# Altium PCB 夏友.PcbDoc (part 5 of 6)
Units mm, origin at the board's own origin, x right, y up, seen from the top; angles counter-clockwise.
Board outline 130.55 x 65.02 mm, 2 copper layers (Top Layer, Bottom Layer); 162 components, 175 nets, 628 pads, 694 vias.
Unrouted connection lines stored in the file: 1.
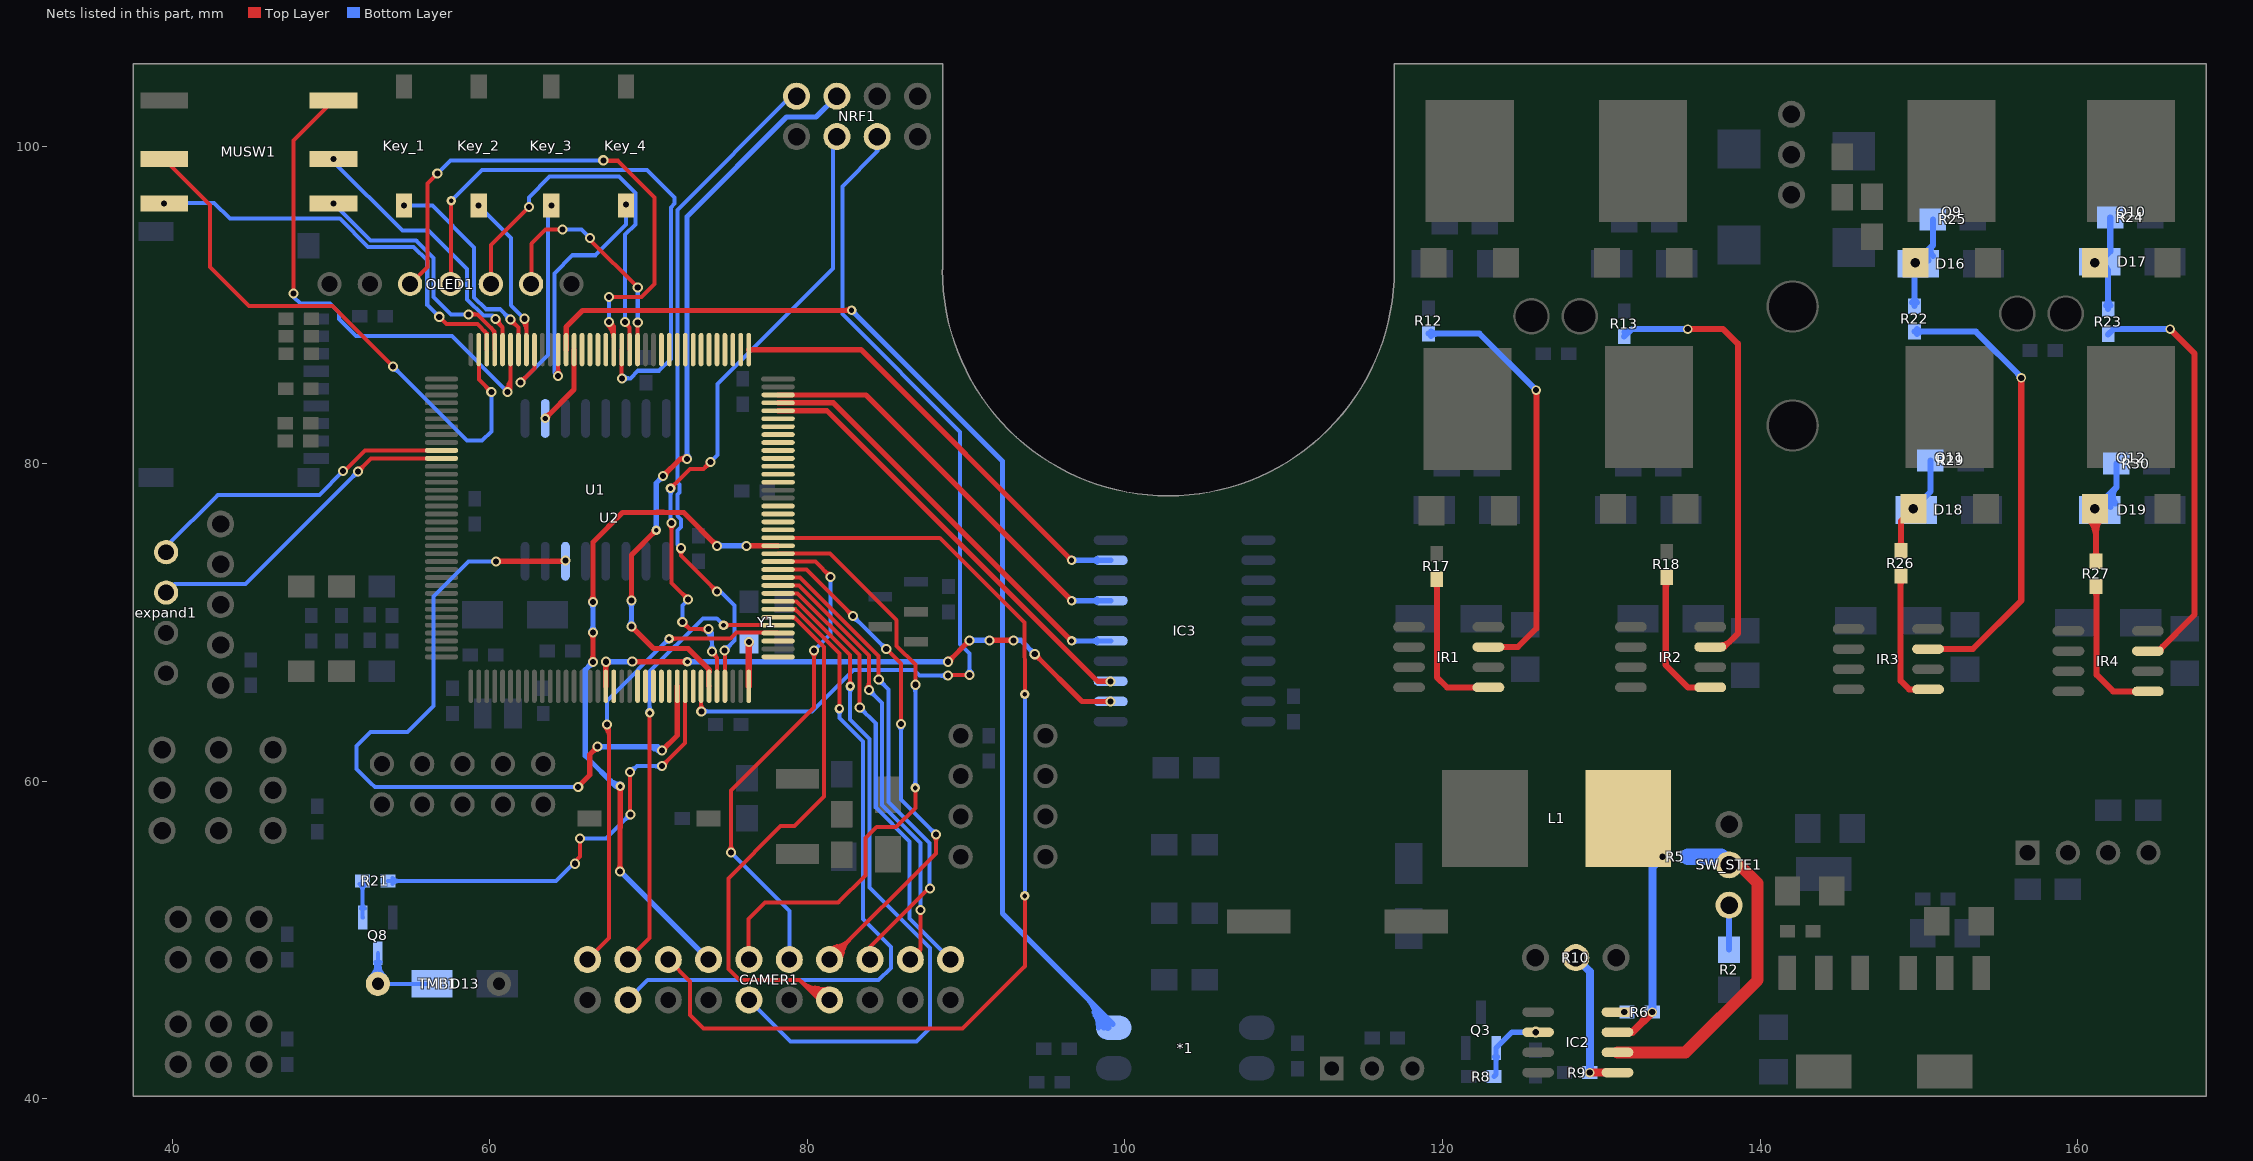
[diagram p5: the nets of this part, all layers, seen from the top]

## Via types
v1: diameter 0.6, hole 0.3, Top Layer to Bottom Layer, 442 vias
v2: diameter 0.635, hole 0.381, Top Layer to Bottom Layer, 150 vias
v3: diameter 0.6, hole 0.381, Top Layer to Bottom Layer, 48 vias
v4: diameter 0.7, hole 0.6, Top Layer to Bottom Layer, 16 vias
v5: diameter 0.6, hole 0.5, Top Layer to Bottom Layer, 10 vias
v6: diameter 0.6, hole 0.4, Top Layer to Bottom Layer, 7 vias
v7: diameter 0.7, hole 0.5, Top Layer to Bottom Layer, 5 vias
v8: diameter 0.6, hole 0.33, Top Layer to Bottom Layer, 5 vias
v9: diameter 0.7, hole 0.4, Top Layer to Bottom Layer, 3 vias
v10: diameter 1, hole 1, Top Layer to Bottom Layer, 2 vias
v11: diameter 3, hole 3, Top Layer to Bottom Layer, 2 vias
v12: diameter 1.016, hole 0.762, Top Layer to Bottom Layer, 2 vias
v13: diameter 0.7, hole 0.381, Top Layer to Bottom Layer, 1 vias
v14: diameter 0.635, hole 0.508, Top Layer to Bottom Layer, 1 vias

## Nets (pads, with @x,y where several pads share a name; then routed paths per layer and width w, separated by ;. In a path a pad name is that pad's centre, name@x,y a point inside that pad or via, vN(x,y) a via of type N, cw(c..) or ccw(c..) an arc to the next point about the centre after c; other vN are vias at no path point) (continued)
NetD13_1: D13.1 Q8.1 TMB1.2 | length 11.8
  Bottom Layer w0.254: TMB1.2@52.51,47.693 ccw(c51.426,48.777) 52.959,48.777 ccw(c54.492,48.777) TMB1.2@53.408,47.693 ; TMB1.2@52.69,47.513 ccw(c52.039,48.164) 52.959,48.164 ccw(c53.879,48.164) TMB1.2@53.228,47.513 ; Q8.1@52.809,48.631 cw(c52.493,48.448) 52.846,48.354 ; 52.826,48.281 cw(c53.281,48.16) Q8.1@53.045,48.567 ; Q8.1@52.873,48.567 cw(c52.637,48.16) 53.092,48.281 ; Q8.1@52.959,49.167 TMB1.2@52.959,47.244 D13.1@56.37,47.244 ; 53.072,48.354 cw(c53.425,48.448) Q8.1@53.109,48.631 ; 52.959,48.299 cw(c53.377,48.299) 53.081,48.595 ccw(c53.377,48.299) 52.959,48.299 ; 52.959,48.299 ccw(c52.541,48.299) 52.837,48.595 cw(c52.541,48.299) 52.959,48.299
NetD16_2: D16.2 Q9.2 R22.1 R25.1 | length 12.7
  Bottom Layer w0.381: R22.1@149.733,89.916 149.733,92.601 v4(149.79,92.657) 150.881,93.749 ; R25.1@150.881,95.377 150.881,93.749 ; 149.733,90.504 cw(c149.227,90.504) 149.585,90.147 ccw(c149.227,90.504) 149.733,90.504 ; 149.733,90.504 ccw(c150.239,90.504) 149.881,90.147 cw(c150.239,90.504) 149.733,90.504 ; D16.2@150.062,92.93 cw(c149.79,93.202) 149.79,92.817 ccw(c149.79,93.202) D16.2@150.062,92.93 ; D16.2@150.062,92.93 ccw(c150.334,92.657) 149.949,92.657 cw(c150.334,92.657) D16.2@150.062,92.93 ; 150.881,93.749 ccw(c151.223,93.406) 150.88,93.065 cw(c151.223,93.406) 150.881,93.749 ; D16.2@149.733,92.135 cw(c150.312,92.135) 149.903,92.545 ccw(c150.312,92.135) D16.2@149.733,92.135 ; D16.2@150.609,92.797 cw(c150.952,93.137) 150.611,93.478 ccw(c150.952,93.137) D16.2@150.609,92.797
NetD17_2: D17.2 Q10.2 R23.2 R24.1 | length 11.9
  Bottom Layer w0.381: D17.2@161.226,92.745 ccw(c161.988,93.244) D17.2@161.802,92.352 ; R23.2@161.925,89.738 D17.2@161.925,92.184 ; R24.1@162.057,95.504 162.057,93.368 D17.2@161.399,92.71 D17.2@161.925,92.184 ; 161.925,90.326 cw(c161.419,90.326) 161.777,89.969 ccw(c161.419,90.326) 161.925,90.326 ; 161.925,90.326 ccw(c162.431,90.326) 162.073,89.969 cw(c162.431,90.326) 161.925,90.326 ; D17.2@161.925,92.184 ccw(c161.162,91.422) 161.102,92.498 cw(c161.162,91.422) D17.2@161.925,92.184 ; D17.2@161.093,92.817 ccw(c161.093,93.814) 161.798,93.109 cw(c161.093,93.814) D17.2@161.093,92.817
  other v4: 161.093,92.657
NetD18_2: D18.2 Q11.2 R26.1 R29.1 | length 10.5
  Top Layer w0.381: R26.1@148.875,74.525 148.875,76.376 v4(149.663,77.163) ; 148.875,75.113 cw(c148.369,75.113) 148.727,74.756 ccw(c148.369,75.113) 148.875,75.113 ; 148.875,75.113 ccw(c149.381,75.113) 149.023,74.756 cw(c149.381,75.113) 148.875,75.113 ; Q11.2@149.391,76.891 cw(c149.663,76.619) 149.663,77.004 ccw(c149.663,76.619) Q11.2@149.391,76.891 ; Q11.2@149.391,76.891 ccw(c149.118,77.163) 149.503,77.163 cw(c149.118,77.163) Q11.2@149.391,76.891
  Bottom Layer w0.381: v4(149.663,77.163) 150.735,78.236 R29.1@150.735,80.2 ; D18.2@149.935,77.436 cw(c149.663,77.708) 149.663,77.323 ccw(c149.663,77.708) D18.2@149.935,77.436 ; D18.2@149.935,77.436 ccw(c150.207,77.163) 149.822,77.163 cw(c150.207,77.163) D18.2@149.935,77.436
NetD19_2: D19.2 Q12.2 R27.2 R30.1 | length 19.6
  Top Layer w0.254: v4(161.093,77.163) Q12.2@161.163,77.093
  Top Layer w0.381: R27.2@161.163,73.863 Q12.2@161.163,77.093 ; 161.163,74.451 cw(c160.657,74.451) 161.015,74.094 ccw(c160.657,74.451) 161.163,74.451 ; 161.163,74.451 ccw(c161.669,74.451) 161.311,74.094 cw(c161.669,74.451) 161.163,74.451 ; Q12.2@160.644,76.615 cw(c159.392,75.362) 161.163,75.362 ccw(c159.392,75.362) Q12.2@160.644,76.615 ; Q12.2@160.98,77.051 cw(c160.538,76.609) 161.163,76.609 ccw(c160.538,76.609) Q12.2@160.98,77.051 ; 161.163,75.701 cw(c162.455,75.701) 161.541,76.615 ccw(c162.455,75.701) 161.163,75.701
  Bottom Layer w0.381: v4(161.093,77.163) 162.438,78.509 ; R30.1@162.438,80.01 162.438,78.509 ; D19.2@161.365,77.436 cw(c161.093,77.708) 161.093,77.323 ccw(c161.093,77.708) D19.2@161.365,77.436 ; D19.2@161.365,77.436 ccw(c161.637,77.163) 161.252,77.163 cw(c161.637,77.163) D19.2@161.365,77.436 ; 162.438,78.509 ccw(c162.98,77.966) 162.369,77.503 cw(c162.98,77.966) 162.438,78.509 ; D19.2@162.066,77.272 cw(c162.629,77.7) 162.129,78.2 ccw(c162.629,77.7) D19.2@162.066,77.272
NetIC2_2: IC2.2 Q3.2 R8.2 | length 5.8
  Bottom Layer w0.33: R8.2@123.25,41.4 123.378,41.528 Q3.2@123.378,43.198 124.38,44.2 v9(125.875,44.2) ; 123.378,42.422 cw(c123.704,42.422) 123.473,42.653 ccw(c123.704,42.422) 123.378,42.422 ; 123.378,42.422 ccw(c123.052,42.422) 123.283,42.653 cw(c123.052,42.422) 123.378,42.422
NetIC2_5: IC2.5 R9.1 R10.2 | length 9.3
  Top Layer w0.508: v6(129.286,41.656) IC2.5@131.024,41.656
  Bottom Layer w0.508: R10.2@128.397,48.895 129.286,48.006 v6(129.286,41.656)
NetIC2_6: IC2.6 R5.2 SW_STE1.2 | length 21.9
  Top Layer w0.762: IC2.6@131.024,42.926 135.301,42.926 139.85,47.475 139.85,53.575 138.688,54.737 SW_STE1.2@138.049,54.737
  Bottom Layer w1.016: R5.2@135.458,55.245 137.541,55.245 SW_STE1.2@138.049,54.737
NetIC2_7: IC2.7 L1.2 R5.1 R6.1 | length 13.6
  Top Layer w0.508: IC2.7@131.024,44.196 131.953,44.196 v6(133.223,45.466)
  Bottom Layer w0.508: v6(133.223,45.466) 133.223,54.61 v6(133.858,55.245) ; R5.1@133.468,54.855 ccw(c133.078,55.245) 133.63,55.245 cw(c133.078,55.245) R5.1@133.468,54.855
NetIC2_8: IC2.8 R6.2
  other v6: 131.445,45.466
NetIR1_5: IR1.5 R17.2 | length 10.8
  Top Layer w0.381: R17.2@119.65,72.298 119.65,66.55 120.287,65.913 IR1.5@122.896,65.913 ; 119.65,72.137 cw(c120.156,72.137) 119.798,72.494 ccw(c120.156,72.137) 119.65,72.137 ; 119.65,72.137 ccw(c119.144,72.137) 119.502,72.494 cw(c119.144,72.137) 119.65,72.137
NetIR1_7: IR1.7 R12.2 | length 28.9
  Top Layer w0.381: IR1.7@122.896,68.453 124.753,68.453 125.925,69.625 125.925,84.6 v3(125.9,84.625) ; v3@125.823,84.548 cw(c125.575,84.3) 125.925,84.3 ccw(c125.575,84.3) v3@125.823,84.548
  Bottom Layer w0.381: R12.2@119.126,88.189 122.336,88.189 v3(125.9,84.625) ; 119.632,88.189 cw(c119.632,88.695) 119.274,88.337 ccw(c119.632,88.695) 119.632,88.189 ; 119.632,88.189 ccw(c119.632,87.683) 119.274,88.041 cw(c119.632,87.683) 119.632,88.189
NetIR2_5: IR2.5 R18.1 | length 10.1
  Top Layer w0.381: R18.1@134.062,72.85 134.062,67.313 135.462,65.913 IR2.5@136.866,65.913 ; 134.062,72.11 cw(c134.783,72.11) 134.273,72.619 ccw(c134.783,72.11) 134.062,72.11
NetIR2_7: IR2.7 R13.1 | length 30.2
  Top Layer w0.381: v3(135.45,88.475) 137.675,88.475 138.6,87.55 138.6,69.3 137.753,68.453 IR2.7@136.866,68.453 ; IR2.7@137.566,68.562 ccw(c137.566,69.278) 138.072,68.772 cw(c137.566,69.278) IR2.7@137.566,68.562
  Bottom Layer w0.381: R13.1@131.445,88.011 131.909,88.475 ; v3(135.45,88.475) 131.909,88.475 ; 131.909,88.475 cw(c131.491,88.893) 131.457,88.303 ccw(c131.491,88.893) 131.909,88.475
NetIR3_5: IR3.5 R26.2 | length 10.2
  Top Layer w0.254: R26.2@148.85,72.9 R26.2@148.875,72.925
  Top Layer w0.381: R26.2@148.85,72.9 148.85,66.325 149.389,65.786 IR3.5@150.582,65.786 ; R26.2@148.727,72.694 cw(c148.43,72.397) 148.85,72.397 ccw(c148.43,72.397) R26.2@148.727,72.694 ; 148.85,72.276 cw(c149.441,72.276) 149.023,72.694 ccw(c149.441,72.276) 148.85,72.276
NetIR3_7: IR3.7 R22.2 | length 31.3
  Top Layer w0.381: IR3.7@150.582,68.326 153.401,68.326 156.45,71.375 v3(156.45,85.4)
  Bottom Layer w0.381: R22.2@149.733,88.316 153.584,88.316 v3@156.475,85.425 ; 150.239,88.316 cw(c150.239,88.822) 149.881,88.464 ccw(c150.239,88.822) 150.239,88.316 ; 150.239,88.316 ccw(c150.239,87.81) 149.881,88.168 cw(c150.239,87.81) 150.239,88.316 ; 156.228,85.672 cw(c155.955,85.4) 156.341,85.4 ccw(c155.955,85.4) 156.228,85.672
NetIR4_5: IR4.5 R27.1 | length 10.8
  Top Layer w0.254: R27.1@161.163,72.263 R27.1@161.2,72.226
  Top Layer w0.381: R27.1@161.2,72.226 161.2,66.7 162.241,65.659 IR4.5@164.425,65.659 ; R27.1@161.015,72.032 cw(c160.568,71.585) 161.2,71.585 ccw(c160.568,71.585) R27.1@161.015,72.032 ; 161.2,71.764 cw(c161.579,71.764) 161.311,72.032 ccw(c161.579,71.764) 161.2,71.764
NetIR4_7: IR4.7 R23.1 | length 27.2
  Top Layer w0.381: IR4.7@164.425,68.199 165.074,68.199 167.375,70.5 167.375,86.925 v3(165.825,88.475) ; IR4.7@165.235,68.199 cw(c165.622,68.199) 165.348,68.473 ccw(c165.622,68.199) IR4.7@165.235,68.199
  Bottom Layer w0.381: R23.1@161.925,88.138 162.262,88.475 v3(165.825,88.475)
NetQ8_2: Q8.2 R21.2 | length 4
  Bottom Layer w0.254: R21.2@51.801,53.528 cw(c51.335,53.062) 51.994,53.062 cw(c52.653,53.062) R21.2@52.187,53.528 ; Q8.2@51.887,51.989 ccw(c51.628,52.248) 51.994,52.248 ; 51.994,52.321 ccw(c52.463,52.321) Q8.2@52.131,51.989 ; R21.2@51.994,53.721 51.994,51.432 Q8.2@52.009,51.417
NetR2_1: R2.1 SW_STE1.3 | length 2.8
  Bottom Layer w0.381: R2.1@138.049,49.398 SW_STE1.3@138.049,52.197
OSC: U2.72 Y1.3 | length 3.4
  Top Layer w0.381: U2.72@76.314,65.981 76.314,68.735 v2(76.337,68.758) ; 76.314,68.396 cw(c76.698,68.396) 76.427,68.668 ccw(c76.698,68.396) 76.314,68.396
PTA4: IC3.2 U2.54 | length 53.7
  Top Layer w0.33: U2.54@67.314,65.981 67.314,67.514 v2(67.325,67.525) ; v2(68.978,67.528) v1@72.425,67.528 ; v2(88.875,67.525) v2(90.225,68.875) ; v2(91.475,68.875) v2(92.975,68.875) ; v2(94.325,68) 97.301,65.024 v2(99.109,65.024) ; 69.346,67.528 cw(c69.346,67.896) 69.086,67.636 ccw(c69.346,67.896) 69.346,67.528 ; 69.346,67.528 ccw(c69.346,67.16) 69.086,67.421 cw(c69.346,67.16) 69.346,67.528 ; 89.135,67.785 cw(c88.875,68.045) 88.875,67.677 ccw(c88.875,68.045) 89.135,67.785 ; 89.135,67.785 ccw(c89.395,67.525) 89.027,67.525 cw(c89.395,67.525) 89.135,67.785 ; 89.965,68.615 cw(c90.225,68.355) 90.225,68.723 ccw(c90.225,68.355) 89.965,68.615 ; 89.965,68.615 ccw(c89.705,68.875) 90.073,68.875 cw(c89.705,68.875) 89.965,68.615 ; 91.843,68.875 cw(c91.843,69.243) 91.583,68.983 ccw(c91.843,69.243) 91.843,68.875 ; 91.843,68.875 ccw(c91.843,68.507) 91.583,68.767 cw(c91.843,68.507) 91.843,68.875 ; 92.607,68.875 cw(c92.607,68.507) 92.867,68.767 ccw(c92.607,68.507) 92.607,68.875 ; 92.607,68.875 ccw(c92.607,69.243) 92.867,68.983 cw(c92.607,69.243) 92.607,68.875 ; 94.585,67.74 cw(c94.845,68) 94.477,68 ccw(c94.845,68) 94.585,67.74 ; 94.585,67.74 ccw(c94.325,67.48) 94.325,67.848 cw(c94.325,67.48) 94.585,67.74 ; 98.741,65.024 cw(c98.741,64.656) 99.001,64.916 ccw(c98.741,64.656) 98.741,65.024 ; 98.741,65.024 ccw(c98.741,65.392) 99.001,65.132 cw(c98.741,65.392) 98.741,65.024 ; v2@67.217,67.417 cw(c66.984,67.184) 67.314,67.184 ccw(c66.984,67.184) v2@67.217,67.417 ; 67.314,67.131 cw(c67.719,67.131) 67.433,67.417 ccw(c67.719,67.131) 67.314,67.131 ; 72.116,67.528 cw(c72.116,67.191) 72.355,67.43 ccw(c72.116,67.191) 72.116,67.528 ; 72.132,67.528 ccw(c72.132,67.843) 72.355,67.62 cw(c72.132,67.843) 72.132,67.528
  Bottom Layer w0.33: v2(67.325,67.525) 68.975,67.525 v2(68.978,67.528) ; v2@67.433,67.417 cw(c67.693,67.157) 67.693,67.525 cw(c67.693,67.893) v2@67.433,67.633 ; v1(72.45,67.525) v2(88.875,67.525) ; v2(90.225,68.875) v2(91.475,68.875) ; v2(92.975,68.875) 93.45,68.875 v2(94.325,68) ; v2@93.083,68.767 cw(c93.343,68.507) 93.343,68.875 cw(c93.343,69.243) v2@93.083,68.983 ; 72.776,67.525 cw(c72.776,67.851) 72.545,67.62 ccw(c72.776,67.851) 72.776,67.525 ; 72.776,67.525 ccw(c72.776,67.199) 72.545,67.43 cw(c72.776,67.199) 72.776,67.525 ; 88.507,67.525 cw(c88.507,67.157) 88.767,67.417 ccw(c88.507,67.157) 88.507,67.525 ; 88.507,67.525 ccw(c88.507,67.893) 88.767,67.633 cw(c88.507,67.893) 88.507,67.525 ; 90.593,68.875 cw(c90.593,69.243) 90.333,68.983 ccw(c90.593,69.243) 90.593,68.875 ; 90.593,68.875 ccw(c90.593,68.507) 90.333,68.767 cw(c90.593,68.507) 90.593,68.875 ; 91.107,68.875 cw(c91.107,68.507) 91.367,68.767 ccw(c91.107,68.507) 91.107,68.875 ; 91.107,68.875 ccw(c91.107,69.243) 91.367,68.983 cw(c91.107,69.243) 91.107,68.875 ; 94.065,68.26 cw(c93.805,68) 94.173,68 ccw(c93.805,68) 94.065,68.26 ; 94.065,68.26 ccw(c94.325,68.52) 94.325,68.152 cw(c94.325,68.52) 94.065,68.26 ; 68.602,67.525 ccw(c68.602,67.904) 68.871,67.636 cw(c68.602,67.904) 68.602,67.525 ; 68.618,67.525 cw(c68.618,67.168) 68.871,67.421 ccw(c68.618,67.168) 68.618,67.525
PTA5: U2.55
PTA6: U2.58
PTA7: U2.59
PTA8: U2.60
PTA9: U2.61
PTA10: U2.62
PTA11: U1.14 U2.63 | length 56.1
  Top Layer w0.33: v2(60.4,73.85) 64.725,73.85 v2(64.775,73.9) ; v2(65.575,59.625) 65.575,59.675 66.3,60.4 66.3,61.675 v2(66.8,62.175) ; v2(70.85,61.925) 71.814,62.889 U2.63@71.814,65.981 ; 60.768,73.85 cw(c60.768,74.218) 60.508,73.958 ccw(c60.768,74.218) 60.768,73.85 ; 60.768,73.85 ccw(c60.768,73.482) 60.508,73.742 cw(c60.768,73.482) 60.768,73.85 ; 66.54,61.915 cw(c66.8,61.655) 66.8,62.023 ccw(c66.8,61.655) 66.54,61.915 ; 66.54,61.915 ccw(c66.28,62.175) 66.648,62.175 cw(c66.28,62.175) 66.54,61.915 ; 71.11,62.185 cw(c70.85,62.445) 70.85,62.077 ccw(c70.85,62.445) 71.11,62.185 ; 71.11,62.185 ccw(c71.37,61.925) 71.002,61.925 cw(c71.37,61.925) 71.11,62.185
  Bottom Layer w0.254: v2(60.4,73.85) 58.675,73.85 56.45,71.625 56.45,64.725 54.825,63.1 52.5,63.1 51.625,62.225 51.625,60.764 52.489,59.9 52.492,59.9 52.766,59.627 53.66,59.627 53.662,59.625 55.304,59.625 55.306,59.627 56.2,59.627 56.202,59.625 57.844,59.625 57.846,59.627 58.74,59.627 58.742,59.625 60.384,59.625 60.386,59.627 61.28,59.627 61.282,59.625 62.924,59.625 62.926,59.627 63.82,59.627 63.822,59.625 v2(65.575,59.625)
  Bottom Layer w0.33: v2(66.8,62.175) 70.6,62.175 v2(70.85,61.925) ; v2@66.908,62.067 cw(c67.168,61.807) 67.168,62.175 cw(c67.168,62.543) v2@66.908,62.283 ; 70.268,62.091 ccw(c70.554,62.586) v2@70.788,62.064 ; 69.879,62.175 cw(c69.879,60.954) 70.742,61.817 ccw(c69.879,60.954) 69.879,62.175
PTA12: R21.1 U2.64 | length 37.9
  Top Layer w0.254: v2(65.378,54.803) 65.378,54.928 65.7,55.25 65.7,56.4 65.681,56.4 v2(65.678,56.403) ; v2(68.828,60.578) 68.828,57.953 v2(68.878,57.903) ; v2(70.85,60.95) 72.314,62.414 U2.64@72.314,65.981 ; v2@70.855,61.14 ccw(c70.866,61.563) 71.168,61.268 ; v2@71.04,60.952 cw(c71.488,60.955) 71.175,61.275 cw(c70.855,61.588) v2@70.852,61.14 ; v2@71.04,60.955 cw(c71.463,60.966) 71.168,61.268 ; v2@70.852,61.14 ccw(c70.857,61.582) 71.166,61.266 ; v2@70.852,61.14 ccw(c70.857,61.582) 71.166,61.266 ; 71.166,61.266 ccw(c71.482,60.957) 71.04,60.952 cw(c71.482,60.957) 71.166,61.266 ; 71.175,61.275 cw(c70.85,61.6) 70.85,61.141 ccw(c70.85,61.6) 71.175,61.275 ; 71.175,61.275 ccw(c71.5,60.95) 71.041,60.95 cw(c71.5,60.95) 71.175,61.275
  Bottom Layer w0.254: R21.1@53.594,53.721 64.171,53.721 65.253,54.803 v2(65.378,54.803) ; R21.1@53.87,53.528 cw(c54.336,53.062) 54.336,53.721 cw(c54.336,54.38) R21.1@53.87,53.914 ; v2(65.678,56.403) 67.328,56.403 68.828,57.903 v2(68.878,57.903) ; v2(68.828,60.578) 68.903,60.578 69.275,60.95 ; v2(70.85,60.95) 69.275,60.95 ; 69.275,60.95 cw(c68.837,61.388) 68.83,60.768 ccw(c68.837,61.388) 69.275,60.95 ; 70.39,60.95 cw(c70.39,60.49) 70.715,60.815 ccw(c70.39,60.49) 70.39,60.95 ; 70.39,60.95 ccw(c70.39,61.41) 70.715,61.085 cw(c70.39,61.41) 70.39,60.95 ; 68.467,57.542 cw(c68.878,57.13) 68.878,57.712 ccw(c68.878,57.13) 68.467,57.542 ; 68.589,57.664 ccw(c68.35,57.903) 68.688,57.903 cw(c68.35,57.903) 68.589,57.664 ; v2@69.019,60.578 cw(c69.299,60.578) 69.101,60.776 ccw(c69.299,60.578) v2@69.019,60.578
PTA13: U2.65
PTA14: NRF1.5 U2.66 | length 64.3
  Top Layer w0.254: U2.66@73.314,65.981 73.314,64.411 v2(73.325,64.4) ; v2(88.85,66.65) 88.9,66.7 v2(90.225,66.7) ; v2@73.19,64.535 ccw(c72.892,64.833) 73.314,64.833 cw(c72.892,64.833) v2@73.19,64.535 ; 73.314,64.886 ccw(c73.811,64.886) 73.46,64.535 cw(c73.811,64.886) 73.314,64.886
  Bottom Layer w0.254: v2(73.325,64.4) 80.306,64.4 82.903,66.997 86.73,66.997 87.077,66.65 v2(88.85,66.65) ; NRF1.5@84.217,99.902 cw(c84.152,99.657) 84.405,99.657 ; NRF1.5@84.405,100.6 84.405,99.657 ; NRF1.5@84.593,99.902 ccw(c84.658,99.657) 84.405,99.657 ; v2(90.225,66.7) 90.225,68.031 89.628,68.628 89.628,82.003 82.208,89.423 82.208,97.46 84.405,99.657 ; 73.785,64.4 cw(c73.785,64.86) 73.46,64.535 ccw(c73.785,64.86) 73.785,64.4 ; 73.785,64.4 ccw(c73.785,63.94) 73.46,64.265 cw(c73.785,63.94) 73.785,64.4 ; 88.39,66.65 cw(c88.39,66.19) 88.715,66.515 ccw(c88.39,66.19) 88.39,66.65 ; 88.39,66.65 ccw(c88.39,67.11) 88.715,66.785 cw(c88.39,67.11) 88.39,66.65 ; 90.225,67.16 cw(c89.765,67.16) 90.09,66.835 ccw(c89.765,67.16) 90.225,67.16 ; 90.225,67.16 ccw(c90.685,67.16) 90.36,66.835 cw(c90.685,67.16) 90.225,67.16
PTA15: NRF1.4 U2.67 | length 57.8
  Top Layer w0.33: v2(68.925,69.75) 70.317,68.358 72.499,68.358 73.782,67.075 ; v2(68.928,71.378) 68.928,74.253 v1(70.487,75.812) ; v2(70.925,79.225) 72,80.3 72.425,80.3 v2(72.429,80.304) ; U2.67@73.814,65.981 73.782,66.014 73.782,67.075 ; 68.928,71.746 cw(c68.56,71.746) 68.821,71.486 ccw(c68.56,71.746) 68.928,71.746 ; 68.928,71.746 ccw(c69.296,71.746) 69.036,71.486 cw(c69.296,71.746) 68.928,71.746 ; 69.185,69.49 cw(c69.445,69.75) 69.077,69.75 ccw(c69.445,69.75) 69.185,69.49 ; 69.185,69.49 ccw(c68.925,69.23) 68.925,69.598 cw(c68.925,69.23) 69.185,69.49 ; 70.257,75.582 cw(c70.487,75.352) 70.487,75.678 ccw(c70.487,75.352) 70.257,75.582 ; 70.257,75.582 ccw(c70.027,75.812) 70.353,75.812 cw(c70.027,75.812) 70.257,75.582 ; 71.185,79.485 cw(c70.925,79.745) 70.925,79.377 ccw(c70.925,79.745) 71.185,79.485 ; 71.185,79.485 ccw(c71.445,79.225) 71.077,79.225 cw(c71.445,79.225) 71.185,79.485 ; 73.782,67.075 cw(c73.644,66.938) 73.828,66.876 ccw(c73.644,66.938) 73.782,67.075 ; 72.051,80.3 ccw(c72.051,80.681) 72.321,80.412 cw(c72.051,80.681) 72.051,80.3 ; 72.07,80.3 cw(c72.07,79.945) 72.321,80.196 ccw(c72.07,79.945) 72.07,80.3 ; 73.726,67.13 cw(c73.477,66.881) 73.829,66.881 ccw(c73.477,66.881) 73.726,67.13
  Bottom Layer w0.33: v2@68.817,69.858 ccw(c68.557,70.118) 68.925,70.118 ccw(c69.293,70.118) v2@69.033,69.858 ; v2@68.821,71.271 cw(c68.569,71.019) 68.925,71.019 ; v2(68.925,69.75) 68.925,71.375 v2(68.928,71.378) ; 68.925,71.002 cw(c69.304,71.002) v2@69.036,71.271 ; v1(70.487,75.812) 70.487,78.788 v2(70.925,79.225) ; v2@72.3,80.3 72.425,80.3 72.425,95.55 78.7,101.825 80.55,101.825 NRF1.4@81.865,103.14 ; v2@72.321,80.412 ccw(c72.07,80.662) 72.425,80.662 ; 72.425,80.681 ccw(c72.806,80.681) v2@72.536,80.412 ; 70.487,76.138 cw(c70.162,76.138) 70.392,75.908 ccw(c70.162,76.138) 70.487,76.138 ; 70.487,76.138 ccw(c70.813,76.138) 70.583,75.908 cw(c70.813,76.138) 70.487,76.138 ; 70.665,78.965 cw(c70.925,78.705) 70.925,79.073 ccw(c70.925,78.705) 70.665,78.965 ; 70.665,78.965 ccw(c70.405,79.225) 70.773,79.225 cw(c70.405,79.225) 70.665,78.965
PTA16: NRF1.3 U2.68 | length 63.2
  Top Layer w0.254: v1(71.388,78.438) 72.625,79.675 73.475,79.675 v2(73.9,80.1) ; v2(71.45,76.25) 71.453,76.247 71.453,72.497 v2(72.5,71.45) ; v2(72.129,70.028) 72.147,70.028 72.6,69.575 v2(73.775,69.575) ; 72.182,71.768 ccw(c72.484,72.063) v2@72.495,71.64 ; 72.182,71.768 cw(c71.887,71.466) v2@72.31,71.455 ; v2@72.31,71.452 ccw(c71.862,71.455) 72.175,71.775 ccw(c72.495,72.088) v2@72.498,71.64 ; v2@73.71,80.095 cw(c73.287,80.084) 73.582,79.782 cw(c73.884,79.487) v2@73.895,79.91 ; v2@73.71,80.098 cw(c73.262,80.095) 73.575,79.775 ; v2@73.898,79.91 ccw(c73.895,79.462) 73.575,79.775 ; v2(74.004,68.178) 74.004,68.071 74.314,67.761 ; v2@74.044,68.227 cw(c73.741,67.862) 74.214,67.906 ; U2.68@74.314,65.981 74.314,67.761 ; 71.683,78.733 cw(c71.388,79.028) 71.388,78.611 ccw(c71.388,79.028) 71.683,78.733 ; 71.683,78.733 ccw(c71.978,78.438) 71.561,78.438 cw(c71.978,78.438) 71.683,78.733 ; 72.175,71.775 cw(c71.85,71.45) 72.309,71.45 ccw(c71.85,71.45) 72.175,71.775 ; 72.175,71.775 ccw(c72.5,72.1) 72.5,71.64 cw(c72.5,72.1) 72.175,71.775 ; 72.184,71.766 cw(c71.868,71.457) 72.31,71.452 ccw(c71.868,71.457) 72.184,71.766 ; 72.184,71.766 ccw(c72.493,72.082) v2@72.498,71.64 ; 72.184,71.766 ccw(c72.493,72.082) v2@72.498,71.64 ; 73.315,69.575 cw(c73.315,69.115) 73.64,69.44 ccw(c73.315,69.115) 73.315,69.575 ; 73.315,69.575 ccw(c73.315,70.035) 73.64,69.71 cw(c73.315,70.035) 73.315,69.575 ; 73.575,79.775 cw(c73.9,79.45) 73.9,79.909 ccw(c73.9,79.45) 73.575,79.775 ; 73.575,79.775 ccw(c73.25,80.1) 73.709,80.1 cw(c73.25,80.1) 73.575,79.775 ; 73.584,79.784 cw(c73.893,79.468) 73.898,79.91 ccw(c73.893,79.468) 73.584,79.784 ; 73.584,79.784 ccw(c73.268,80.093) 73.71,80.098 cw(c73.268,80.093) 73.584,79.784 ; 74.314,67.761 cw(c74.625,68.072) 74.191,68.146 ccw(c74.625,68.072) 74.314,67.761 ; v2@71.315,76.115 cw(c70.983,75.783) 71.453,75.783 ccw(c70.983,75.783) v2@71.315,76.115 ; 71.453,75.798 cw(c71.902,75.798) 71.585,76.115 ccw(c71.902,75.798) 71.453,75.798 ; v2@72.129,69.838 cw(c72.129,69.334) 72.485,69.69 ccw(c72.129,69.334) v2@72.129,69.838 ; v2@72.319,70.028 ccw(c72.735,70.028) 72.441,69.734 cw(c72.735,70.028) v2@72.319,70.028
  Bottom Layer w0.254: v1@71.4,78.438 71.4,76.3 v2(71.45,76.25) ; v2(72.129,70.028) 72.129,71.079 v2(72.5,71.45) ; v2(73.775,69.575) 74.004,69.346 v2(74.004,68.178) ; v2(73.9,80.1) 74.355,80.555 74.355,85.031 81.625,92.301 81.625,100.36 NRF1.3@81.865,100.6 ; 73.908,68.976 cw(c74.301,69.203) v2@73.931,69.465 ; 74.004,68.638 cw(c73.544,68.638) 73.869,68.313 ccw(c73.544,68.638) 74.004,68.638 ; 74.004,68.638 ccw(c74.464,68.638) 74.138,68.313 cw(c74.464,68.638) 74.004,68.638 ; v1@71.265,78.315 cw(c70.94,77.99) 71.4,77.99 ccw(c70.94,77.99) v1@71.265,78.315 ; 71.4,78.05 cw(c71.775,78.05) 71.51,78.315 ccw(c71.775,78.05) 71.4,78.05 ; v2@73.64,69.44 cw(c72.763,68.563) 74.004,68.563 ccw(c72.763,68.563) v2@73.64,69.44 ; v2@73.82,69.62 cw(c73.376,69.176) 74.004,69.176 ccw(c73.376,69.176) v2@73.82,69.62
PTA17: NRF1.2 U2.69 | length 51.2
  Top Layer w0.254: v2(72.05,74.675) 72.05,74.207 v2(74.304,71.954) ; v2@74.113,71.958 ccw(c73.691,71.969) 73.986,72.271 ccw(c74.288,72.566) v2@74.299,72.144 ; v2@74.302,72.144 cw(c74.298,72.591) 73.978,72.279 ; v2(74.8,68.225) 74.814,68.211 U2.69@74.814,65.981 ; 72.05,74.215 cw(c72.51,74.215) 72.185,74.54 ccw(c72.51,74.215) 72.05,74.215 ; 72.05,74.215 ccw(c71.59,74.215) 71.915,74.54 cw(c71.59,74.215) 72.05,74.215 ; 73.978,72.279 cw(c73.653,71.954) 74.113,71.954 ccw(c73.653,71.954) 73.978,72.279 ; 73.978,72.279 ccw(c74.304,72.604) 74.304,72.144 cw(c74.304,72.604) 73.978,72.279 ; 73.978,72.279 cw(c73.666,71.959) v2@74.113,71.955 ; 73.988,72.269 cw(c73.672,71.961) v2@74.113,71.956 ; 73.988,72.269 cw(c73.672,71.961) v2@74.113,71.956 ; 73.988,72.27 ccw(c74.296,72.585) 74.301,72.144 cw(c74.296,72.585) 73.988,72.27
  Bottom Layer w0.254: v2(72.05,74.675) 71.825,74.9 71.825,75.781 72.047,76.003 72.047,76.497 71.825,76.719 71.825,78.056 71.967,78.198 71.967,78.677 71.825,78.819 71.825,95.975 78.99,103.14 NRF1.2@79.325,103.14 ; v2(74.304,71.954) 74.546,71.954 75.425,71.075 75.425,68.85 v2(74.8,68.225) ; 75.116,68.541 cw(c74.807,68.857) 74.802,68.415 ccw(c74.805,68.863) 75.125,68.55 ; 75.116,68.541 ccw(c75.432,68.232) 74.99,68.227 cw(c75.438,68.23) 75.125,68.55 ; 75.125,68.55 cw(c74.8,68.875) 74.8,68.415 ccw(c74.8,68.875) 75.125,68.55 ; 75.125,68.55 ccw(c75.45,68.225) 74.991,68.225 cw(c75.45,68.225) 75.125,68.55
PTA19: U2.73
PTA24: U2.75
PTA25: CAMER1.19 U2.76 | length 34
  Top Layer w0.254: CAMER1.19@66.167,48.768 67.525,50.126 67.525,63.425 v2(67.375,63.575) ; 67.439,63.097 cw(c67.666,63.228) v2@67.497,63.429 ; v1(71.3,68.975) 75.15,68.975 75.53,69.355 78.14,69.355 U2.76@78.164,69.331 ; 71.718,68.975 cw(c71.718,69.393) 71.422,69.097 ccw(c71.718,69.393) 71.718,68.975 ; 71.718,68.975 ccw(c71.718,68.557) 71.422,68.853 cw(c71.718,68.557) 71.718,68.975 ; v2@67.24,63.44 cw(c66.553,62.753) 67.525,62.753 ccw(c66.553,62.753) v2@67.24,63.44
  Bottom Layer w0.254: v2(67.375,63.575) 67.375,65.05 v1(71.3,68.975) ; 71.005,68.68 cw(c71.3,68.384) 71.3,68.802 ccw(c71.3,68.384) 71.005,68.68 ; 71.005,68.68 ccw(c70.709,68.975) 71.127,68.975 cw(c70.709,68.975) 71.005,68.68
PTA26: CAMER1.17 U2.77 | length 31
  Top Layer w0.254: CAMER1.17@68.707,48.768 70.075,50.136 v1(70.075,64.3) ; v1@74.731,69.831 U2.77@78.164,69.831 ; v1@74.847,69.703 cw(c75.157,69.393) 75.157,69.831 ccw(c75.157,69.393) v1@74.847,69.703 ; v1@74.847,69.947 ccw(c75.128,70.228) 75.128,69.831 cw(c75.128,70.228) v1@74.847,69.947
  Top Layer w0.381: v1(74.725,69.825) v1@74.731,69.831
  Bottom Layer w0.254: v1(70.075,64.3) 70.075,66.9 73.425,70.25 74.3,70.25 v1(74.725,69.825) ; 70.075,64.718 cw(c69.657,64.718) 69.953,64.422 ccw(c69.657,64.718) 70.075,64.718 ; 70.075,64.718 ccw(c70.493,64.718) 70.197,64.422 cw(c70.493,64.718) 70.075,64.718
PTA27: CAMER1.8 U2.78 | length 48.5
  Top Layer w0.254: U2.78@78.164,70.331 79.171,70.331 81.05,68.452 81.05,59.025 79.2,57.175 78.325,57.175 75.025,53.875 75.025,48.175 75.725,47.475 79.525,47.475 ; 80.443,46.753 cw(c80.337,45.304) CAMER1.8@81.437,46.253 ; 80.482,46.996 cw(c80.36,45.323) CAMER1.8@81.629,46.42 ; CAMER1.8@81.407,46.228 80.772,46.228 79.525,47.475 ; 79.525,47.475 ccw(c80.905,48.855) 81.271,46.938 cw(c80.905,48.855) 79.525,47.475 ; U2.78@79.064,70.308 cw(c79.064,69.994) 79.286,70.216 ccw(c79.064,69.994) U2.78@79.064,70.308 ; 79.864,47.136 ccw(c81.014,48.285) 81.319,46.689 cw(c81.014,48.285) 79.864,47.136 ; 80.203,46.797 ccw(c81.122,47.716) 81.367,46.439 cw(c81.122,47.716) 80.203,46.797 ; 80.542,46.458 ccw(c81.231,47.147) 81.414,46.19 cw(c81.231,47.147) 80.542,46.458
PTA28: CAMER1.18 U2.79 | length 45.7
  Top Layer w0.254: U2.79@78.164,70.831 79.246,70.831 82.025,68.052 v1(82.025,64.575) ; U2.79@79.064,70.808 cw(c79.064,70.313) 79.414,70.663 ccw(c79.064,70.313) U2.79@79.064,70.808
  Bottom Layer w0.254: CAMER1.18@68.707,46.228 69.954,47.475 84.5,47.475 85.275,48.25 85.275,49.55 83.5,51.325 83.5,62.5 82.025,63.975 v1(82.025,64.575) ; 82.025,64.157 cw(c82.443,64.157) 82.147,64.453 ccw(c82.443,64.157) 82.025,64.157 ; 82.025,64.157 ccw(c81.607,64.157) 81.903,64.453 cw(c81.607,64.157) 82.025,64.157
PTA29: CAMER1.12 U2.80 | length 46.9
  Top Layer w0.254: U2.80@78.164,71.331 79.321,71.331 82.7,67.952 v1(82.7,65.975) ; 82.7,66.393 cw(c82.282,66.393) 82.578,66.097 ccw(c82.282,66.393) 82.7,66.393 ; 82.7,66.393 ccw(c83.118,66.393) 82.822,66.097 cw(c83.118,66.393) 82.7,66.393
  Bottom Layer w0.254: CAMER1.12@76.327,46.228 78.935,43.62 86.875,43.62 87.719,44.464 87.719,49.506 83.906,53.319 83.906,62.668 82.7,63.875 v1(82.7,65.975) ; 82.7,65.557 cw(c83.118,65.557) 82.822,65.853 ccw(c83.118,65.557) 82.7,65.557 ; 82.7,65.557 ccw(c82.282,65.557) 82.578,65.853 cw(c82.282,65.557) 82.7,65.557
PTB0: CAMER1.1 U2.81 | length 31.1
  Top Layer w0.254: U2.81@78.164,71.831 79.395,71.831 83.279,67.947 83.279,64.678 v2(83.304,64.653)
  Bottom Layer w0.254: v2(83.304,64.653) 84.313,63.644 84.313,58.35 86.45,56.213 86.45,51.35 89.027,48.773 CAMER1.1@89.027,48.768 ; v2@83.306,64.463 cw(c83.309,64.015) 83.629,64.328 ; v2@83.306,64.463 cw(c83.312,64.021) 83.62,64.337 ; v2@83.495,64.651 ccw(c83.936,64.646) 83.62,64.337 ; v2@83.495,64.652 ccw(c83.942,64.648) 83.629,64.328 ; 83.629,64.328 cw(c83.954,64.653) 83.495,64.653 ccw(c83.954,64.653) 83.629,64.328 ; 83.629,64.328 ccw(c83.304,64.003) 83.304,64.463 cw(c83.304,64.003) 83.629,64.328
PTB1: CAMER1.3 U2.82 | length 33.7
  Top Layer w0.254: U2.82@78.164,72.331 79.47,72.331 83.875,67.926 83.875,65.757 v2(83.879,65.753) ; CAMER1.3@86.487,48.768 87.125,49.406 ; v2(87.125,51.9) 87.125,49.406 ; 87.125,49.406 cw(c86.983,49.548) 86.875,49.378 ccw(c86.983,49.548) 87.125,49.406 ; 87.125,49.406 ccw(c87.267,49.264) 87.097,49.156 cw(c87.267,49.264) 87.125,49.406 ; v2@83.744,65.888 ccw(c83.429,66.203) 83.875,66.203 cw(c83.429,66.203) v2@83.744,65.888 ; 83.875,66.223 ccw(c84.349,66.223) 84.014,65.888 cw(c84.349,66.223) 83.875,66.223
  Bottom Layer w0.254: v2(83.879,65.753) 84.719,64.913 84.719,58.518 87.125,56.113 v2(87.125,51.9) ; v2@84.07,65.751 ccw(c84.511,65.746) 84.195,65.437 ccw(c83.887,65.121) 83.881,65.563 cw(c83.884,65.115) 84.204,65.428 ; v2@84.07,65.752 ccw(c84.517,65.748) 84.204,65.428 ; 84.204,65.428 cw(c84.53,65.753) 84.07,65.753 ccw(c84.53,65.753) 84.204,65.428 ; 84.204,65.428 ccw(c83.879,65.103) 83.879,65.563 cw(c83.879,65.103) 84.204,65.428
PTB2: CAMER1.5 U2.83 | length 33.3
  Top Layer w0.254: U2.83@78.164,72.831 79.545,72.831 84.5,67.876 v2(84.5,66.4) ; CAMER1.5@83.947,48.768 83.947,49.566 87.633,53.253 v2(87.729,53.253)
  Bottom Layer w0.254: v2(84.5,66.4) 85.126,65.774 85.126,58.687 87.7,56.112 87.7,53.282 v2(87.729,53.253) ; 84.825,66.075 ccw(c84.505,65.762) 84.502,66.21 cw(c84.507,65.768) 84.816,66.084 cw(c85.132,66.393) 84.69,66.398 ccw(c85.138,66.395) 84.825,66.075 ; 84.825,66.075 cw(c85.15,66.4) 84.691,66.4 ccw(c85.15,66.4) 84.825,66.075 ; v2@84.5,66.209 cw(c84.5,65.75) 84.825,66.075 ccw(c84.5,65.75) v2@84.5,66.209
PTB3: CAMER1.7 U2.84 | length 60.8
  Top Layer w0.254: U2.84@78.164,73.331 79.944,73.331 v2(82.875,70.4) ; CAMER1.7@81.12,48.827 cw(c82.126,48.621) 81.86,49.612 ; CAMER1.7@81.369,48.776 cw(c82.576,48.529) 82.257,49.719 ; CAMER1.7@81.407,48.768 88.1,55.461 v2(88.1,56.65) ; CAMER1.7@81.415,48.73 ccw(c81.168,49.937) 82.358,49.618 ; CAMER1.7@81.466,48.481 ccw(c81.26,49.487) 82.251,49.221 ; v2@82.685,70.402 ccw(c82.237,70.405) 82.55,70.725 ; v2@82.685,70.405 ccw(c82.262,70.416) 82.557,70.718 ccw(c82.859,71.013) v2@82.87,70.59 ; v2@82.873,70.59 cw(c82.87,71.038) 82.55,70.725 ; v2(84.975,68.325) 85.9,67.4 v2(85.9,63.6) ; 82.208,49.569 cw(c81.407,50.369) 81.407,49.237 ccw(c81.407,50.369) 82.208,49.569 ; 82.208,49.569 ccw(c83.008,48.768) 81.876,48.768 cw(c83.008,48.768) 82.208,49.569 ; 82.55,70.725 cw(c82.225,70.4) 82.685,70.4 ccw(c82.225,70.4) 82.55,70.725 ; 82.55,70.725 ccw(c82.875,71.05) 82.875,70.59 cw(c82.875,71.05) 82.55,70.725 ; 82.559,70.716 cw(c82.243,70.407) 82.685,70.402 ccw(c82.243,70.407) 82.559,70.716 ; 82.559,70.716 ccw(c82.868,71.032) 82.873,70.59 cw(c82.868,71.032) 82.559,70.716 ; 82.641,50.002 cw(c81.407,51.236) 81.407,49.491 ccw(c81.407,51.236) 82.641,50.002 ; 82.641,50.002 ccw(c83.875,48.768) 82.13,48.768 cw(c83.875,48.768) 82.641,50.002 ; 88.1,56.19 cw(c88.56,56.19) 88.235,56.515 ccw(c88.56,56.19) 88.1,56.19 ; 88.1,56.19 ccw(c87.64,56.19) 87.965,56.515 cw(c87.64,56.19) 88.1,56.19
  Bottom Layer w0.254: v2(82.875,70.4) 84.95,68.325 v2(84.975,68.325) ; v2@82.877,70.21 cw(c82.88,69.762) 83.2,70.075 ; v2@82.877,70.21 cw(c82.882,69.768) 83.191,70.084 cw(c83.507,70.393) v2@83.065,70.398 ; v2@83.065,70.398 ccw(c83.513,70.395) 83.2,70.075 ; v2(85.9,63.6) 85.9,58.85 v2(88.1,56.65) ; v2@88.098,56.84 cw(c88.093,57.282) 87.784,56.966 cw(c87.468,56.657) 87.91,56.652 ccw(c87.462,56.655) 87.775,56.975 ; v2@88.098,56.84 cw(c88.095,57.288) 87.775,56.975 ; 83.2,70.075 cw(c83.525,70.4) 83.066,70.4 ccw(c83.525,70.4) 83.2,70.075 ; 83.2,70.075 ccw(c82.875,69.75) 82.875,70.209 cw(c82.875,69.75) 83.2,70.075 ; 85.9,63.14 cw(c86.36,63.14) 86.035,63.465 ccw(c86.36,63.14) 85.9,63.14 ; 85.9,63.14 ccw(c85.44,63.14) 85.765,63.465 cw(c85.44,63.14) 85.9,63.14 ; 87.775,56.975 cw(c87.45,56.65) 87.909,56.65 ccw(c87.45,56.65) 87.775,56.975 ; 87.775,56.975 ccw(c88.1,57.3) 88.1,56.841 cw(c88.1,57.3) 87.775,56.975 ; 84.607,68.668 ccw(c84.975,69.036) 84.975,68.515 cw(c84.975,69.036) 84.607,68.668 ; 84.667,68.608 cw(c84.385,68.325) 84.784,68.325 ccw(c84.385,68.325) 84.667,68.608
PTB4: CAMER1.9 U2.85 | length 39.1
  Top Layer w0.254: v2(75.2,55.5) 75.2,59.425 80.425,64.65 v2(80.425,68.225) ; U2.85@78.164,73.831 80.519,73.831 v2(81.475,72.875) ; 81.157,73.193 ccw(c81.459,73.488) v2@81.47,73.065 ; 81.157,73.193 cw(c80.862,72.891) v2@81.285,72.88 ; v2@81.285,72.877 ccw(c80.837,72.88) 81.15,73.2 ; 75.2,55.96 cw(c74.74,55.96) 75.065,55.635 ccw(c74.74,55.96) 75.2,55.96 ; 75.2,55.96 ccw(c75.66,55.96) 75.335,55.635 cw(c75.66,55.96) 75.2,55.96 ; 80.425,67.765 cw(c80.885,67.765) 80.56,68.09 ccw(c80.885,67.765) 80.425,67.765 ; 80.425,67.765 ccw(c79.965,67.765) 80.29,68.09 cw(c79.965,67.765) 80.425,67.765 ; 81.15,73.2 ccw(c81.47,73.513) v2@81.473,73.065 ; 81.15,73.2 cw(c80.825,72.875) 81.285,72.875 ccw(c80.825,72.875) 81.15,73.2 ; 81.15,73.2 ccw(c81.475,73.525) 81.475,73.066 cw(c81.475,73.525) 81.15,73.2 ; 81.159,73.191 cw(c80.843,72.882) 81.285,72.877 ccw(c80.843,72.882) 81.159,73.191 ; 81.159,73.191 ccw(c81.468,73.507) v2@81.473,73.065 ; 81.159,73.191 ccw(c81.468,73.507) v2@81.473,73.065
  Bottom Layer w0.254: v2(75.2,55.5) 78.867,51.833 CAMER1.9@78.867,48.768 ; v2(80.425,68.225) 81.475,69.275 v2(81.475,72.875)
PTB5: CAMER1.11 U2.86 | length 41.6
  Top Layer w0.254: CAMER1.11@76.327,48.768 76.3,48.795 76.3,51.325 77.325,52.35 81.95,52.35 83.675,54.075 83.675,56.425 84.375,57.125 85.6,57.125 86.804,58.329 v1(86.804,59.579) ; U2.86@78.164,74.331 81.437,74.331 85.629,70.139 85.629,68.521 86.804,67.346 v2(86.804,66.078)
  Bottom Layer w0.254: v1(86.804,59.579) v2(86.804,66.078) ; 86.804,59.997 cw(c86.387,59.997) 86.682,59.702 ccw(c86.387,59.997) 86.804,59.997 ; 86.804,59.997 ccw(c87.222,59.997) 86.927,59.702 cw(c87.222,59.997) 86.804,59.997 ; 86.804,65.618 cw(c87.264,65.618) 86.939,65.944 ccw(c87.264,65.618) 86.804,65.618 ; 86.804,65.618 ccw(c86.344,65.618) 86.67,65.944 cw(c86.344,65.618) 86.804,65.618
PTB6: CAMER1.13 U2.87 | length 55.6
  Top Layer w0.33: v2(66.5,69.375) 66.5,67.507 v2(66.503,67.503) ; v2(66.5,71.3) 66.5,75.05 68.375,76.925 70.543,76.925 70.55,76.933 70.95,76.933 70.958,76.925 72.225,76.925 v2(74.325,74.825) ; v2(68.2,54.325) v1@68.226,59.675 ; v2(76.175,74.825) 76.181,74.831 U2.87@78.164,74.831 ; 66.5,69.007 cw(c66.868,69.007) 66.608,69.267 ccw(c66.868,69.007) 66.5,69.007 ; 66.5,69.007 ccw(c66.132,69.007) 66.392,69.267 cw(c66.132,69.007) 66.5,69.007 ; 66.5,71.668 cw(c66.132,71.668) 66.392,71.408 ccw(c66.132,71.668) 66.5,71.668 ; 66.5,71.668 ccw(c66.868,71.668) 66.608,71.408 cw(c66.868,71.668) 66.5,71.668 ; 68.202,54.693 cw(c67.834,54.695) 68.093,54.433 ccw(c67.834,54.695) 68.202,54.693 ; 68.202,54.693 ccw(c68.57,54.691) 68.308,54.432 cw(c68.57,54.691) 68.202,54.693 ; 74.065,75.085 cw(c73.805,74.825) 74.173,74.825 ccw(c73.805,74.825) 74.065,75.085 ; 74.065,75.085 ccw(c74.325,75.345) 74.325,74.977 cw(c74.325,75.345) 74.065,75.085 ; v2@66.395,67.611 ccw(c66.143,67.863) 66.5,67.863 cw(c66.143,67.863) v2@66.395,67.611 ; 66.5,67.879 ccw(c66.879,67.879) 66.611,67.611 cw(c66.879,67.879) 66.5,67.879 ; v1@68.129,59.58 cw(c67.895,59.348) 68.224,59.347 ccw(c67.895,59.348) v1@68.129,59.58 ; 68.225,59.352 cw(c68.546,59.35) 68.32,59.579 ccw(c68.546,59.35) 68.225,59.352
  Bottom Layer w0.33: v2@66.351,67.503 cw(c65.983,67.503) 66.243,67.243 cw(c66.503,66.983) v2@66.503,67.351 ; v2@66.392,69.483 ccw(c66.132,69.743) 66.5,69.743 ccw(c66.868,69.743) v2@66.608,69.483 ; v2@66.392,71.192 cw(c66.132,70.932) 66.5,70.932 cw(c66.868,70.932) v2@66.608,71.192 ; v2(66.5,69.375) v2(66.5,71.3) ; v2(66.503,67.503) 66.015,67.015 66.015,61.61 67.95,59.675 v1(68.225,59.675) ; 67.64,59.967 cw(c67.441,59.222) v1@68.108,59.608 ; v2(68.2,54.325) 68.23,54.325 CAMER1.13@73.787,48.768 ; v2(74.325,74.825) v2(76.175,74.825) ; v2@74.433,74.717 cw(c74.693,74.457) 74.693,74.825 cw(c74.693,75.193) v2@74.433,74.933 ; 75.807,74.825 cw(c75.807,74.457) 76.067,74.717 ccw(c75.807,74.457) 75.807,74.825 ; 75.807,74.825 ccw(c75.807,75.193) 76.067,74.933 cw(c75.807,75.193) 75.807,74.825 ; 67.525,60.1 ccw(c68.225,60.799) 68.225,59.81 cw(c68.225,60.799) 67.525,60.1
PTB7: CAMER1.15 U2.88 | length 66.5
  Top Layer w0.254: CAMER1.15@71.247,48.768 72.625,47.39 72.625,45.275 73.475,44.425 89.775,44.425 93.7,48.35 v1(93.7,52.775) ; U2.88@78.164,75.331 88.344,75.331 93.675,70 v1(93.7,65.475)
  Bottom Layer w0.254: v1@93.7,52.75 v1(93.7,65.475)
PTB8: U2.89
PTB9: U2.90
PTB10: U2.91
PTB11: U2.92
PTB16: U2.95
PTB17: U2.96
PTB18: U2.97
PTB19: U2.98
PTB20: U2.99
PTB21: U2.100
PTB22: U2.101
PTB23: U2.102
PTC0: U2.103
PTC1: IC3.3 U2.104 | length 29.2
  Top Layer w0.33: U2.104@78.164,83.331 81.244,83.331 98.281,66.294 v2(99.109,66.294) ; 98.741,66.294 cw(c98.741,65.926) 99.001,66.186 ccw(c98.741,65.926) 98.741,66.294 ; 98.741,66.294 ccw(c98.741,66.662) 99.001,66.402 cw(c98.741,66.662) 98.741,66.294
PTC2: IC3.5 U2.105 | length 29.7
  Top Layer w0.33: U2.105@78.164,83.831 79.596,83.831 81.65,83.831 v8(96.647,68.834) ; 96.417,69.064 cw(c96.186,68.834) 96.512,68.834 ccw(c96.186,68.834) 96.417,69.064 ; 96.417,69.064 ccw(c96.647,69.295) 96.647,68.969 cw(c96.647,69.295) 96.417,69.064
  Bottom Layer w0.33: v8(96.647,68.834) IC3.5@99.109,68.834 ; v8@96.742,68.739 cw(c96.973,68.508) 96.973,68.834 cw(c96.973,69.16) v8@96.742,68.929 ; 98.008,68.834 cw(c98.008,68.508) 98.239,68.739 ccw(c98.008,68.508) 98.008,68.834 ; 98.008,68.834 ccw(c98.008,69.16) 98.239,68.929 cw(c98.008,69.16) 98.008,68.834
PTC3: IC3.7 U2.106 | length 28.9
  Top Layer w0.33: U2.106@78.164,84.331 83.69,84.331 v8(96.647,71.374) ; 96.417,71.604 cw(c96.186,71.374) 96.512,71.374 ccw(c96.186,71.374) 96.417,71.604 ; 96.417,71.604 ccw(c96.647,71.835) 96.647,71.509 cw(c96.647,71.835) 96.417,71.604
  Bottom Layer w0.33: v8(96.647,71.374) IC3.7@99.109,71.374 ; v8@96.742,71.279 cw(c96.973,71.048) 96.973,71.374 cw(c96.973,71.7) v8@96.742,71.469 ; 98.008,71.374 cw(c98.008,71.048) 98.239,71.279 ccw(c98.008,71.048) 98.008,71.374 ; 98.008,71.374 ccw(c98.008,71.7) 98.239,71.469 cw(c98.008,71.7) 98.008,71.374
PTC4: IC3.9 U2.109 | length 30.8
  Top Layer w0.33: U2.109@76.314,87.181 83.38,87.181 v8(96.647,73.914) ; 96.417,74.144 cw(c96.186,73.914) 96.512,73.914 ccw(c96.186,73.914) 96.417,74.144 ; 96.417,74.144 ccw(c96.647,74.375) 96.647,74.049 cw(c96.647,74.375) 96.417,74.144
  Bottom Layer w0.33: v8(96.647,73.914) IC3.9@99.109,73.914 ; v8@96.742,73.819 cw(c96.973,73.588) 96.973,73.914 cw(c96.973,74.24) v8@96.742,74.009 ; 98.008,73.914 cw(c98.008,73.588) 98.239,73.819 ccw(c98.008,73.588) 98.008,73.914 ; 98.008,73.914 ccw(c98.008,74.24) 98.239,74.009 cw(c98.008,74.24) 98.008,73.914
PTC5: U2.110
PTC6: U2.111
PTC7: U2.112
PTC8: U2.113
PTC9: U2.114
PTC10: U2.115
PTC11: U2.116
PTC12: U2.117
PTC13: U2.118
PTC14: U2.119
PTC15: U2.120
PTC16: OLED1.6 U2.123 | length 15.1
  Top Layer w0.254: OLED1.6@62.611,91.313 62.625,91.327 62.625,93.85 63.525,94.75 v2(64.575,94.75) ; v2(66.325,94.2) 66.325,94.1 v2(69.325,91.1) ; U2.123@69.314,87.181 69.314,88.889 v2(69.325,88.9)
  Bottom Layer w0.254: v2(64.575,94.75) 65.775,94.75 v2(66.325,94.2) ; v2(69.325,88.9) v2(69.325,91.1)
PTC17: OLED1.5 U2.124 | length 25.5
  Top Layer w0.254: OLED1.5@60.071,91.313 60.071,93.771 v2(62.475,96.175) ; v2(68.528,88.929) 68.528,88.853 68.814,88.567 ; U2.124@68.814,87.181 68.814,88.567 ; 68.814,88.567 cw(c69.069,88.822) 68.715,88.892 ccw(c69.069,88.822) 68.814,88.567 ; v2@68.528,88.739 cw(c68.528,88.464) 68.722,88.658 ccw(c68.528,88.464) v2@68.528,88.739
  Bottom Layer w0.254: v2(62.475,96.175) 62.475,96.775 63.775,98.075 68.15,98.075 69.172,97.053 69.172,95.072 68.528,94.429 v2(68.528,88.929)
PTC18: OLED1.4 U2.125 | length 37.2
  Top Layer w0.254: OLED1.4@57.531,91.313 57.575,91.357 v1(57.575,96.55) ; U2.125@68.314,87.181 68.314,85.386 v2(68.325,85.375)
  Bottom Layer w0.254: v1(57.575,96.55) 59.525,98.5 69.9,98.5 71.65,96.75 71.65,96.375 71.419,96.143 71.419,86.594 70.677,85.852 69.334,85.852 68.857,85.375 v2(68.325,85.375) ; v2@68.46,85.24 cw(c68.785,84.915) 68.785,85.375 cw(c68.785,85.835) v2@68.46,85.51
PTC19: OLED1.3 U2.126 | length 40.1
  Top Layer w0.254: OLED1.3@54.991,91.313 56.075,92.397 56.075,97.65 v2(56.7,98.275) ; v2(67.153,99.105) 67.183,99.075 68.075,99.075 70.375,96.775 70.375,91.306 69.572,90.503 67.528,90.503 v2(67.525,90.5) ; v2@67.52,88.735 cw(c67.51,88.397) 67.803,88.566 ; v2(67.525,88.925) 67.814,88.636 ; v2@67.709,88.876 ccw(c67.951,88.811) 67.734,88.686 ; U2.126@67.814,87.181 67.814,88.636 ; 67.814,88.636 cw(c68.057,88.879) 67.715,88.908 ccw(c68.057,88.879) 67.814,88.636 ; 67.814,88.636 ccw(c67.571,88.393) 67.542,88.735 cw(c67.571,88.393) 67.814,88.636 ; v2@67.39,88.79 cw(c66.367,87.767) 67.814,87.767 ccw(c66.367,87.767) v2@67.39,88.79 ; v2@67.57,88.97 cw(c66.981,88.381) 67.814,88.381 ccw(c66.981,88.381) v2@67.57,88.97
  Bottom Layer w0.254: v2(56.7,98.275) 57.53,99.105 v2(67.153,99.105) ; v2(67.525,88.925) v2(67.525,90.5)
PTD0: U2.127
PTD1: U2.128
PTD2: U2.129
PTD3: U2.130
PTD4: U1.2 U2.131 | length 6.1
  Top Layer w0.33: v8(63.5,82.85) 65.314,84.664 U2.131@65.314,87.181 ; 63.73,83.08 cw(c63.5,83.311) 63.5,82.985 ccw(c63.5,83.311) 63.73,83.08 ; 63.73,83.08 ccw(c63.961,82.85) 63.635,82.85 cw(c63.961,82.85) 63.73,83.08
PTD5: *1.2 U2.132 | length 84.8
  Top Layer w0.33: U2.132@64.814,87.181 64.814,88.614 65.85,89.65 v8@82.788,89.65 ; 82.432,89.65 ccw(c82.432,90.018) 82.692,89.758 cw(c82.432,90.018) 82.432,89.65
  Bottom Layer w0.33: v8@82.788,89.528 cw(c82.788,89.202) 83.018,89.432 cw(c83.248,89.663) v8@82.922,89.663 ; v8(82.788,89.663) 92.3,80.15 92.3,51.663 *1.2@99.259,44.704 ; 98.076,45.454 ccw(c99.626,45.869) *1.2@98.928,44.425 ; *1.2@98.422,44.775 ccw(c97.945,45.05) 98.477,45.192 ; 98.435,45.347 ccw(c99.274,45.571) *1.2@99.029,44.738 ; 97.525,46.438 cw(c95.557,44.47) 98.34,44.47 ccw(c95.557,44.47) 97.525,46.438 ; 98.089,45.874 cw(c96.684,44.47) 98.67,44.47 ccw(c96.684,44.47) 98.089,45.874 ; 98.652,45.311 cw(c97.812,44.47) 99.001,44.47 ccw(c97.812,44.47) 98.652,45.311
PTD6: Key_4.1 U2.133 | length 18.1
  Top Layer w0.254: v2(64.3,85.525) 64.314,85.539 U2.133@64.314,87.181 ; v2@64.165,85.66 ccw(c63.806,86.019) 64.314,86.019 cw(c63.806,86.019) v2@64.165,85.66 ; 64.314,85.951 ccw(c64.726,85.951) 64.435,85.66 cw(c64.726,85.951) 64.314,85.951
  Bottom Layer w0.254: v2(64.3,85.525) 64.081,85.744 64.081,91.981 65.225,93.125 66.65,93.125 68.575,95.05 v2(68.575,96.325) ; 68.575,95.865 cw(c69.035,95.865) 68.71,96.19 ccw(c69.035,95.865) 68.575,95.865 ; 68.575,95.865 ccw(c68.115,95.865) 68.44,96.19 cw(c68.115,95.865) 68.575,95.865
PTD7: Key_3.1 U2.136 | length 19.4
  Top Layer w0.254: v2(61.928,85.104) 62.814,85.99 U2.136@62.814,87.181 ; v2@61.93,85.295 ccw(c61.933,85.742) 62.253,85.429 ; v2@61.933,85.295 ccw(c61.944,85.717) 62.246,85.422 ccw(c62.541,85.12) v2@62.118,85.109 ; v2@62.119,85.106 cw(c62.566,85.109) 62.253,85.429 ; 62.244,85.42 cw(c61.935,85.736) 61.93,85.295 ccw(c61.935,85.736) 62.244,85.42 ; 62.244,85.42 ccw(c62.56,85.112) 62.119,85.106 cw(c62.56,85.112) 62.244,85.42 ; 62.253,85.429 cw(c61.928,85.755) 61.928,85.295 ccw(c61.928,85.755) 62.253,85.429 ; 62.253,85.429 ccw(c62.578,85.104) 62.119,85.104 cw(c62.578,85.104) 62.253,85.429
  Bottom Layer w0.254: v2(61.928,85.104) 63.675,86.851 63.675,96.06 v2(63.881,96.266) ; v2@61.928,85.295 ccw(c61.928,85.755) 62.253,85.429 ccw(c62.578,85.104) v2@62.119,85.104
PTD8: Key_2.1 U2.137 | length 12
  Top Layer w0.254: v2(62.2,89.125) 62.314,89.011 U2.137@62.314,87.181 ; 62.232,88.702 cw(c62.398,88.798) v2@62.299,88.962 ; v2@62.065,88.99 cw(c61.465,88.39) 62.314,88.39 ccw(c61.465,88.39) v2@62.065,88.99
  Bottom Layer w0.254: v2(59.309,96.266) 61.35,94.225 61.35,89.975 v2(62.2,89.125)
PTD9: Key_1.1 U2.138 | length 20.7
  Top Layer w0.254: v2(61.3,89.075) 61.814,88.561 U2.138@61.814,87.181 ; v2@61.305,88.885 cw(c61.316,88.462) 61.618,88.757 cw(c61.913,89.059) v2@61.49,89.07 ; v2@61.49,89.073 ccw(c61.938,89.07) 61.625,88.75 ; v2@61.302,88.885 cw(c61.305,88.437) 61.625,88.75 ; v2@61.302,88.885 cw(c61.307,88.443) 61.616,88.759 ccw(c61.307,88.443) v2@61.302,88.885 ; 61.625,88.75 cw(c61.95,89.075) 61.49,89.075 ccw(c61.95,89.075) 61.625,88.75 ; 61.625,88.75 ccw(c61.3,88.425) 61.3,88.885 cw(c61.3,88.425) 61.625,88.75 ; v2@61.49,89.073 ccw(c61.932,89.068) 61.616,88.759 cw(c61.932,89.068) v2@61.49,89.073
  Bottom Layer w0.254: v2(54.61,96.266) 56.384,96.266 59.025,93.625 59.025,90.475 59.775,89.725 60.65,89.725 v2(61.3,89.075) ; v2@61.11,89.077 ccw(c60.662,89.08) 60.975,89.4 ; v2@61.11,89.077 ccw(c60.668,89.082) 60.984,89.391 ccw(c61.293,89.707) 61.298,89.265 cw(c61.295,89.713) 60.975,89.4 ; 60.975,89.4 cw(c60.65,89.075) 61.109,89.075 ccw(c60.65,89.075) 60.975,89.4 ; 60.975,89.4 ccw(c61.3,89.725) 61.3,89.266 cw(c61.3,89.725) 60.975,89.4
PTD10: MUSW1.3 U2.139 | length 35.3
  Top Layer w0.254: v2(47.65,90.725) 47.65,100.355 MUSW1.3@50.165,102.87 ; v2(61.125,84.525) 61.314,84.714 U2.139@61.314,87.181 ; 61.223,85.063 ccw(c61.527,84.888) v2@61.266,84.653 ; v2@60.99,84.66 ccw(c60.209,85.441) 61.314,85.441 cw(c60.209,85.441) v2@60.99,84.66 ; v2@61.17,84.48 ccw(c60.822,84.828) 61.314,84.828 cw(c60.822,84.828) v2@61.17,84.48
  Bottom Layer w0.254: v2(47.65,90.725) 47.65,90.5 48.075,90.075 49.95,90.075 50.5,89.525 50.5,89.106 51.575,88.031 57.619,88.031 v2(61.125,84.525)
PTD11: MUSW1.2 U2.140 | length 19.1
  Top Layer w0.254: v2@60.378,89.022 60.814,88.586 U2.140@60.814,87.181 ; v2@60.378,88.914 cw(c60.378,88.653) 60.563,88.837 ccw(c60.378,88.653) v2@60.378,88.914 ; v2@60.568,89.104 ccw(c61.227,89.104) 60.761,88.639 cw(c61.227,89.104) v2@60.568,89.104
  Bottom Layer w0.254: v2(50.165,99.187) 50.165,99.01 54.5,94.675 56.15,94.675 58.572,92.253 58.572,90.353 59.606,89.319 60.164,89.319 v2(60.378,89.104)
PTD12: MUSW1.1 U2.141 | length 18.5
  Top Layer w0.254: v2(58.653,89.404) 59.234,89.404 60.314,88.324 U2.141@60.314,87.181 ; 59.113,89.404 cw(c59.113,89.864) 58.788,89.539 ccw(c59.113,89.864) 59.113,89.404 ; 59.113,89.404 ccw(c59.113,88.944) 58.788,89.27 cw(c59.113,88.944) 59.113,89.404 ; 60.103,88.535 cw(c59.648,88.081) 60.291,88.081 ccw(c59.648,88.081) 60.103,88.535
  Bottom Layer w0.254: v2(50.165,96.393) 52.508,94.05 55.375,94.05 56.475,92.95 56.475,90.5 57.571,89.404 v2(58.653,89.404)
PTD13: MUSW1.6 U2.142 | length 27
  Top Layer w0.254: v2(56.825,89.25) 57.275,88.8 59.225,88.8 59.814,88.211 U2.142@59.814,87.181 ; 59.683,88.342 cw(c59.422,88.081) 59.791,88.081 ccw(c59.422,88.081) 59.683,88.342
  Bottom Layer w0.254: v2(39.497,96.393) 39.529,96.425 42.65,96.425 43.65,95.425 50.558,95.425 52.34,93.644 55.207,93.644 56.069,92.782 56.069,90.006 v2(56.825,89.25)
PTD14: MUSW1.5 U2.143 | length 43.1
  Top Layer w0.254: MUSW1.5@39.497,99.187 42.4,96.284 42.4,92.375 44.85,89.925 50.1,89.925 v2(53.9,86.125) ; U2.143@59.314,87.181 59.314,85.286 v2(60.1,84.5) ; 59.782,84.818 ccw(c60.084,85.113) v2@60.095,84.69 ; 59.782,84.818 cw(c59.487,84.516) v2@59.91,84.505 ; v2@60.098,84.69 cw(c60.095,85.138) 59.775,84.825 ; 59.775,84.825 ccw(c60.1,85.15) 60.1,84.691 cw(c60.1,85.15) 59.775,84.825 ; 59.775,84.825 cw(c59.462,84.505) v2@59.91,84.502 ; 59.784,84.816 cw(c59.468,84.507) v2@59.91,84.502 ; 59.784,84.816 cw(c59.468,84.507) v2@59.91,84.502 ; 59.784,84.816 ccw(c60.093,85.132) 60.098,84.69 cw(c60.093,85.132) 59.784,84.816 ; 59.775,84.825 cw(c59.45,84.5) 59.909,84.5 ccw(c59.45,84.5) 59.775,84.825
  Bottom Layer w0.254: v2(53.9,86.125) 58.575,81.45 59.525,81.45 60.1,82.025 v2(60.1,84.5) ; v2@53.902,85.935 cw(c53.905,85.487) 54.225,85.8 ; v2@53.902,85.935 cw(c53.907,85.493) 54.216,85.809 cw(c54.532,86.117) v2@54.09,86.123 ; v2@54.09,86.123 ccw(c54.538,86.12) 54.225,85.8 ; 54.225,85.8 cw(c54.55,86.125) 54.09,86.125 ccw(c54.55,86.125) 54.225,85.8 ; 54.225,85.8 ccw(c53.9,85.475) 53.9,85.934 cw(c53.9,85.475) 54.225,85.8
PTE7: expand1.1 U2.10 | length 20.2
  Top Layer w0.254: v2(50.775,79.525) 50.85,79.525 52.156,80.831 U2.10@56.964,80.831
  Bottom Layer w0.254: expand1.1@39.624,74.422 39.624,74.774 42.875,78.025 49.275,78.025 v2(50.775,79.525)
PTE8: expand1.2 U2.11 | length 27.9
  Top Layer w0.254: v2(51.7,79.5) 52.531,80.331 U2.11@56.964,80.331 ; v2@51.705,79.69 ccw(c51.716,80.113) 52.018,79.818 ; v2@51.89,79.505 cw(c52.313,79.516) 52.018,79.818 ; v2@51.702,79.69 ccw(c51.707,80.132) 52.016,79.816 cw(c51.707,80.132) v2@51.702,79.69 ; v2@51.702,79.69 ccw(c51.705,80.138) 52.025,79.825 ccw(c52.338,79.505) v2@51.89,79.502 ; v2@51.89,79.502 cw(c52.332,79.507) 52.016,79.816 ccw(c52.332,79.507) v2@51.89,79.502 ; 52.025,79.825 cw(c51.7,80.15) 51.7,79.691 ccw(c51.7,80.15) 52.025,79.825 ; 52.025,79.825 ccw(c52.35,79.5) 51.891,79.5 cw(c52.35,79.5) 52.025,79.825
  Bottom Layer w0.254: expand1.2@39.624,71.882 40.167,72.425 44.625,72.425 v2(51.7,79.5) ; 51.375,79.175 cw(c51.7,78.85) 51.7,79.31 ccw(c51.7,78.85) 51.375,79.175 ; 51.375,79.175 ccw(c51.05,79.5) 51.51,79.5 cw(c51.05,79.5) 51.375,79.175 ; 51.375,79.175 ccw(c51.062,79.495) 51.51,79.498 cw(c51.068,79.493) 51.384,79.184 cw(c51.693,78.868) 51.698,79.31 ccw(c51.695,78.862) 51.375,79.175